# Altium PCB BlockDetector.PcbDoc
Units mil, origin at the board's own origin, x right, y up, seen from the top; angles counter-clockwise.
Board outline 6000 x 4000 mil, 2 copper layers (Top Layer, Bottom Layer); 19 components, 12 nets, 51 pads, 2 vias.
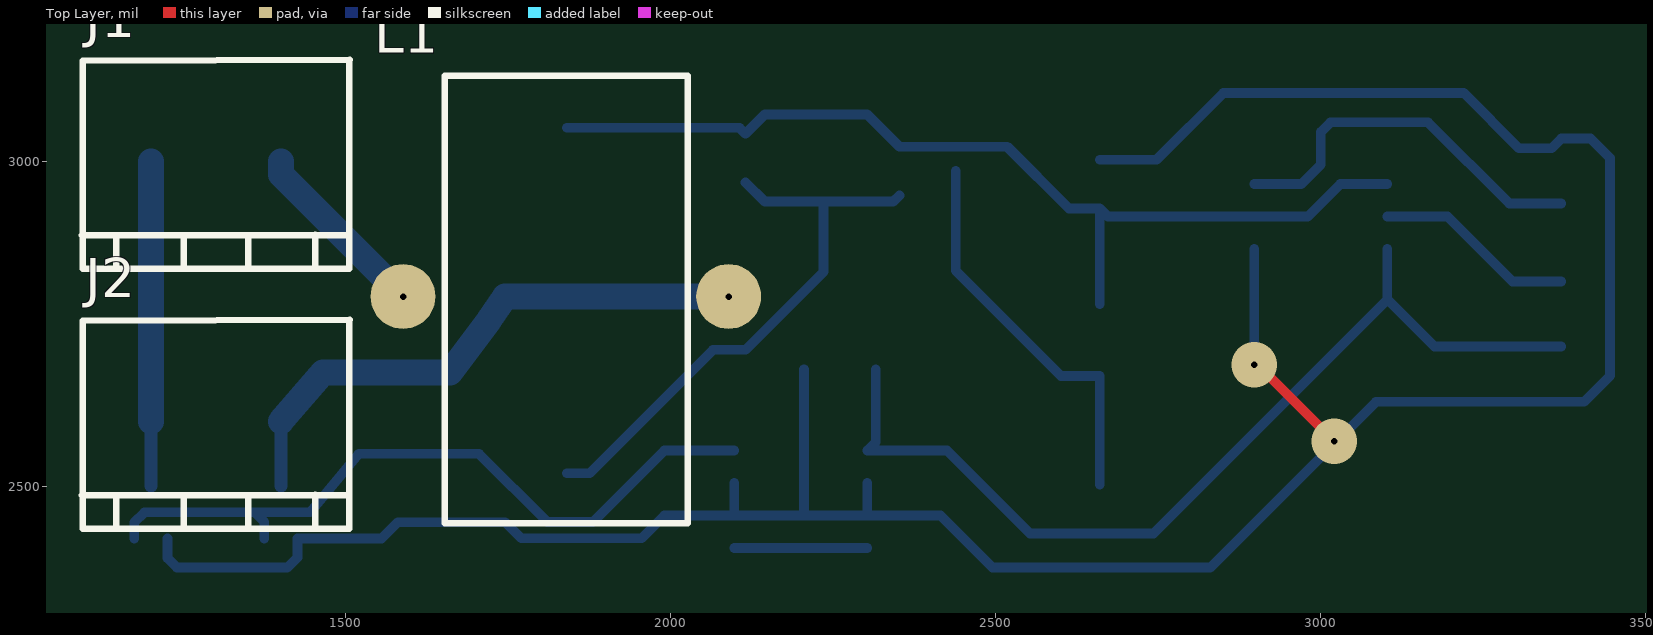
[diagram p0: Top Layer view]
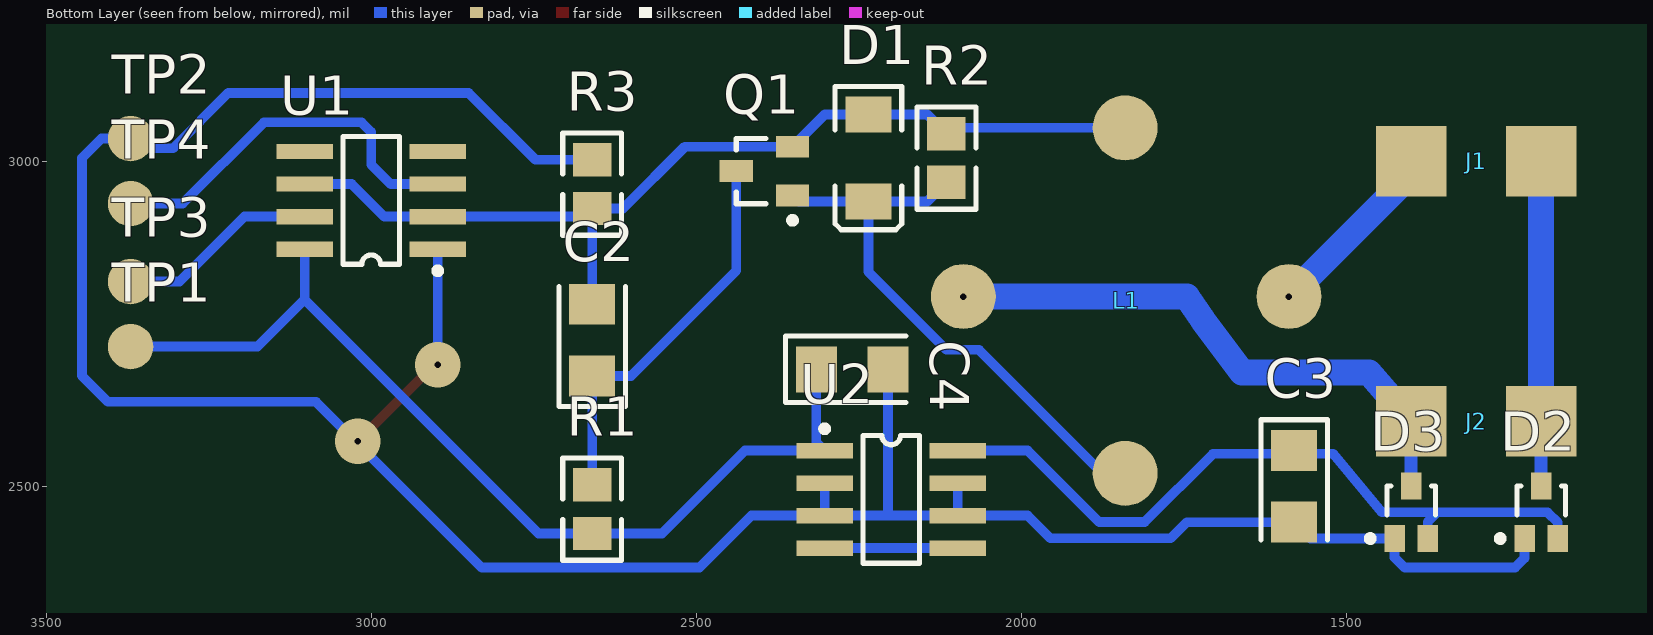
[diagram p1: Bottom Layer view, seen from below]

## Layer stack, top to bottom
Top Layer: signal copper 1.4
Dielectric: dielectric 12.6, FR-4, Dk 4.8
Bottom Layer: signal copper 1.4

## Board outline
1000,1000 7000,1000 7000,5000 1000,5000

## Design rules (kind name [scope] priority, off if disabled: settings)
Clearance [All] p1: gap=10
ComponentClearance [All] p1: gap=10 collisioncheckmode=2
PolygonConnect [All] p1: connectstyle=Relief reliefconductorwidth=10 reliefentries=4 polygonreliefangle="90 Angle"
RoutingVias [All] p1: holewidth=28 width=50 viastyle="Through Hole" minholewidth=28 minwidth=50 maxholewidth=28 maxwidth=50
SolderMaskExpansion [All] p1: expansion=4
TestPointUsage [All] p1: valid=0 allowmultiple=FALSE
Testpoint [All] p1: side=15 testpointundercomponent=TRUE minsize=40 maxsize=100 preferedsize=60 minholesize=0 maxholesize=40 preferedholesize=32 testpointgrid=1 style=1023 order=1234567890
Width [All] p1: maxlimit=40 minlimit=10 preferedwidth=15
17 further rules are at their usual default settings.

## Components (designator, comment, footprint, x,y, rotation, side; value= is the part's Value field where it differs from the comment)
C2 "Cap Pol1" CC3216-1206 2660,2725 r90 bottom
C3 "Cap Pol1" CC3216-1206 1580,2500 r270 bottom
C4 "10v" CC3216-1206 2260,2680 r180 bottom
D1 "1N4148" MELF-D3516-1406 2235,3005 r270 bottom
D2 "BAV99W" SOT-323 1200,2460 r180 bottom
D3 "BAV99W" SOT-323 1400,2460 r180 bottom
J1 "Screw Terminal 2 Way" "Screw Terminal 2 way 0.2" 1100,2900 r270 top
J2 "Screw Terminal 2 Way" "Screw Terminal 2 way 0.2" 1100,2500 r270 top
L1 "*" VT-5 1840,2520 r180 top
Q1 "MMBT100A" SO-G3 2395,2985 r90 bottom
R1 "Res2" CR2012-0805 2660,2465 r270 bottom
R2 "Res2" CR2012-0805 2115,3005 r270 bottom
R3 "Res2" CR2012-0805 2660,2965 r270 bottom
TP1 "Test Point" TestPoint 3370,2715 r270 bottom
TP2 "Test Point" TestPoint 3370,3035 r0 bottom
TP3 "O/C Output" TestPoint 3370,2815 r0 bottom
TP4 "Bipolar output" TestPoint 3370,2935 r0 bottom
U1 "LM555CM" M08A 3000,2940 r90 bottom
U2 "LM78L05ACM" M08A 2200,2480 r270 bottom

## Footprints (in the part's own frame and the unit in brackets; to place one, negate y for a bottom-side part, rotate by r counter-clockwise, add the part's x,y. Pads: shape width x height; smd on the part's side, far side on the other; paste and mask are expansions set on the pad)
CC3216-1206 [mm]
  rect 1.6x1.8 smd: 1(-1.4,0) 2(1.4,0)
  silkscreen extent -2.6,-1.3 2.1,1.3
CR2012-0805 [mm]
  rect 1.3x1.5 smd: 1(-0.95,0) 2(0.95,0)
  silkscreen extent -2,-1.15 2,1.15
M08A [mm] "Small Outline; 8 Leads; Body Width 3.9 mm; Pitch 1.27 mm"
  rect 0.6x2.2 smd: 1(-1.905,-2.6) 2(-0.635,-2.6) 3(0.635,-2.6) 4(1.905,-2.6) 5(1.905,2.6) 6(0.635,2.6) 7(-0.635,2.6) 8(-1.905,2.6)
  silkscreen extent -2.88,-2.72 2.5,1.1
MELF-D3516-1406 [mm]
  rect 1.4x1.8 smd: 1(-1.7,0) 2(1.7,0)
  silkscreen extent -2.8,-1.3 2.8,1.3
"Screw Terminal 2 way 0.2" [mm]
  rect 2.75x2.75 smd far side: 1(-2.54,7.62) 2(-2.54,2.54)
  silkscreen extent -6.5,-0.15 1.65,10.31
SO-G3 [mm]
  rect 0.85x1.3 smd: 1(-0.95,-1.1) 2(0.95,-1.1) 3(0,1.1)
  silkscreen extent -2.05,-1.22 1.28,1.1
SOT-323 [mm] "SOT-323/SC-70; 3 Leads; Body 2.2 x 2.2 mm, inc. leads (LxW max)"
  rect 0.8x1.05 smd: 1(-0.65,-1.025) 2(0.65,-1.025) 3(0,1.025)
  silkscreen extent -1.73,-1.15 0.95,1.03
TestPoint [mil]
  round 70 smd: 1(0,0)
VT-5 [mil]
  round 100 smd far side: 1(0,0) 2(0,-531.5)
  round 100 hole 10: 3(252,-272) 4(-249,-272)
  silkscreen extent -186,-612 188,77

## Part data
C2 C3: "Polarized Capacitor (Radial)"
C4: library part "Cap Pol1", "Polarized Capacitor (Radial)"
D1: library part "Diode 1N4148", "High Conductance Fast Diode"
D2 D3: "Silicon Switching Diode Array for High-Speed Switching"
L1: library part Inductor, "Inductor"
Q1: "General Purpose Amplifier NPN Silicon"
R1 R2 R3: "Resistor"
TP1 TP2 TP3 TP4: library part TestPoint
U1: library part LM555CJ, "Timer"
U2: "3-Terminal Positive Regulator"

## Via types
v1: diameter 70, hole 10, Top Layer to Bottom Layer, 2 vias

## Nets (pads, with @x,y where several pads share a name; then routed paths per layer and width w, separated by ;. In a path a pad name is that pad's centre, name@x,y a point inside that pad or via, vN(x,y) a via of type N, cw(c..) or ccw(c..) an arc to the next point about the centre after c; other vN are vias at no path point)
GND: C3.2 C4.2 D2.1 D3.1 R3.1 TP2.1 U1.1 U2.2 U2.3 U2.6 U2.7 | length 4372.8
  Top Layer w15: v1(2897.64,2687.36) 2902.64,2687.36 v1(3020.89,2569.11)
  Bottom Layer w15: D2.1 1225.59,2389.41 1240,2375 1410,2375 1425.59,2390.59 D3.1 1554.76,2419.65 C3.2 1745.12,2444.88 1770,2420 1955,2420 1990,2455 2415,2455 2495,2375 2830,2375 3085,2630 3405,2630 3445,2670 3445,3005 3415,3035 TP2.1 3355,3020 3305,3020 3220,3105 2850,3105 2747.4,3002.4 R3.1 ; U2.6 U2.7 ; 2204.88,2455.12 C4.2 ; U2.3 U2.2 ; v1(2897.64,2687.36) U1.1
NetC2_1: C2.1 Q1.3 R1.1 | length 609.5
  Bottom Layer w15: Q1.3 2438.31,2831.69 2600.12,2669.88 C2.1 R1.1
NetC2_2: C2.2 D1.1 L1.2 Q1.2 R2.1 R3.2 U1.2 U1.6 | length 1511.6
  Bottom Layer w15: L1.2 2105.91,3051.5 R2.1 2144.53,3071.93 D1.1 2302.17,3071.93 Q1.2 2517.6,3022.4 2612.4,2927.6 R3.2 ; C2.2 R3.2 ; U1.6 3030,2965 2980,2915 2672.6,2915 R3.2
NetC3_1: C3.1 D2.2 D3.2 U2.8 | length 1132
  Bottom Layer w15: D2.2 1174.41,2444.41 1190,2460 1445,2460 1520.12,2550.12 1579.99,2550.05 1625,2550 1705,2550 1810,2445 1880,2445 1990,2555 U2.8 ; 1360,2460 1374.41,2445.59 D3.2
NetD1_2: D1.2 L1.1 Q1.1 R2.2 | length 884.3
  Bottom Layer w15: L1.1 1875,2520 2065,2710 2115,2710 2235,2830 D1.2 ; R2.2 2144.53,2938.07 2342.17,2938.07 Q1.1
NetD2_3: D2.3 J1.2 J2.2 | length 499.6
  Bottom Layer w20: D2.3 J2.2
  Bottom Layer w40: J2.2 J1.2
NetD3_3: D3.3 J2.1 L1.4 | length 882.5
  Bottom Layer w20: D3.3 J2.1
  Bottom Layer w40: J2.1 1465,2675 1660,2675 1720,2755 1745,2792 L1.4
NetJ1_1: J1.1 L1.3 | length 285.9
  Bottom Layer w40: J1.1 1400,2980 L1.3
NetTP3_1: TP3.1 U1.7 | length 309.1
  Bottom Layer w15: U1.7 3195,2915 3295,2815 TP3.1
NetTP4_1: TP4.1 U1.3 | length 592.8
  Bottom Layer w15: U1.3 2970,2965 3000,2995 3000,3045 3015,3060 3165,3060 3290,2935 TP4.1
NetU2_4: U2.4 U2.5 | length 204.7
  Bottom Layer w15: U2.5 U2.4
VCC: C4.1 R1.2 TP1.1 U1.8 U2.1 | length 1507.3
  Bottom Layer w15: C4.1 2315.12,2567.76 U2.1 2425,2555 2552.4,2427.6 2742.6,2427.6 3102.36,2787.36 ; U1.8 3102.36,2787.36 ; TP1.1 3174.72,2715 3102.36,2787.36
pads on no net: U1.4 U1.5